# Altium PCB PCB.PcbDoc
Units mm, origin at the board's own origin, x right, y up, seen from the top; angles counter-clockwise.
Board outline 29.56 x 10.8 mm, 2 copper layers (Top Layer, Bottom Layer), stack 0.98 mm thick; 3 components, 3 nets, 24 pads, 4 vias.
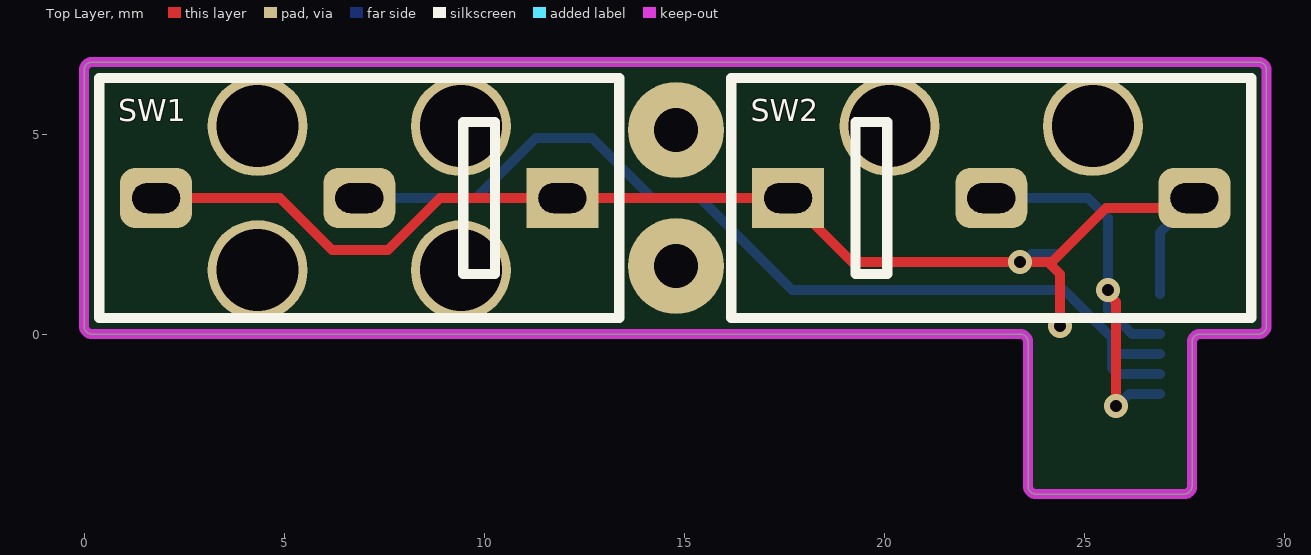
[diagram p0: Top Layer view]
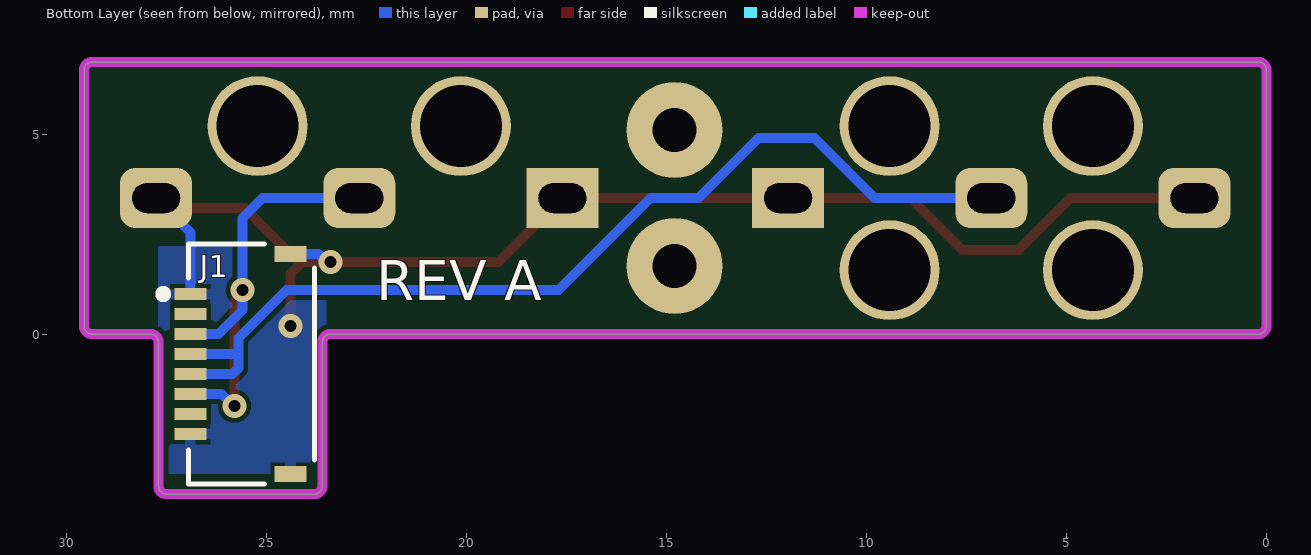
[diagram p1: Bottom Layer view, seen from below]

## Layer stack, top to bottom
Top Solder: solder mask 0.0102, Solder Resist, Dk 3.5
Top Layer: signal copper 0.0356
Dielectric 1: dielectric 0.9086, FR-4, Dk 4.8
Bottom Layer: signal copper 0.0356
Bottom Solder: solder mask 0.0102, Solder Resist, Dk 3.5

## Board outline
23.4,0 cw(c23.4,-0.2) 23.6,-0.2 23.6,-3.8 ccw(c23.8,-3.8) 23.8,-4 27.5,-4 ccw(c27.5,-3.8) 27.7,-3.8 27.7,-0.2 cw(c27.9,-0.2) 27.9,0 29.36,0 ccw(c29.36,0.2) 29.56,0.2 29.56,6.6 ccw(c29.36,6.6) 29.36,6.8 0.2,6.8 ccw(c0.2,6.6) 0,6.6 0,0.2 ccw(c0.2,0.2) 0.2,0

## Design rules (kind name [scope] priority, off if disabled: settings)
BoardOutlineClearance [All] p1: gap=0.2 ignorepadtopadclearanceinfootprint=FALSE
Clearance GND_bot [InNamedPolygon('GND_bot')] p1: gap=0.2 ignorepadtopadclearanceinfootprint=FALSE
Clearance GND_top [InNamedPolygon('GND_top')] p2: gap=0.1 ignorepadtopadclearanceinfootprint=FALSE
Clearance [All] p3: gap=0.12 ignorepadtopadclearanceinfootprint=FALSE
HoleSize [All] p1: absolutevalues=TRUE maxlimit=10 minlimit=0.025 maxpercent=80.000 minpercent=20.000
MinimumSolderMaskSliver [All] p1: minsoldermaskwidth=0.05
PolygonConnect [All] p1: thpad.connectstyle=Relief thpad.reliefconductorwidth=0.254 thpad.reliefentries=4 thpad.polygonreliefangle="90 Angle" thpad.airgapwidth=0.1 smdpad.connectstyle=Relief smdpad.reliefconductorwidth=0.254 smdpad.reliefentries=4 smdpad.polygonreliefangle="90 Angle" smdpad.airgapwidth=0.1 via.connectstyle=Direct via.reliefconductorwidth=0.254 via.reliefentries=4 via.polygonreliefangle="90 Angle" via.airgapwidth=0.254
RoutingVias [All] p1: holewidth=0.3 width=0.4 viastyle="Through Hole" minholewidth=0.3 minwidth=0.4 maxholewidth=2 maxwidth=10
SilkToSilkClearance [All] p1: silktosilkclearance=0.01
SilkToSolderMaskClearance [IsPad] p1: minsilkscreentomaskgap=0.001 clearancetoexposedcopper=TRUE
SolderMaskExpansion [All] p1: expansion=0.05 istentingtop=FALSE
SupplyNets "Schematic Supply Nets_1" [InNet('GND')] p1: voltage=0.000
UnRoutedNet [All] p1: checkbadconnections=TRUE
Width [All] p1: maxlimit=2.54 minlimit=0.089 preferedwidth=0.254
25 further rules are at their usual default settings.

## Components (designator, comment, footprint, x,y, rotation, side; value= is the part's Value field where it differs from the comment)
J1 "2328702-8" 2328702-8 23.55,-0.75 r90 bottom
SW1 "Microswitch" Microswitch 6.88,3.4 r270 top
SW2 "Microswitch" Microswitch 22.68,3.4 r90 top

## Footprints (in the part's own frame and the unit in brackets; to place one, negate y for a bottom-side part, rotate by r counter-clockwise, add the part's x,y. Pads: shape width x height; smd on the part's side, far side on the other; paste and mask are expansions set on the pad)
2328702-8 [mm]
  rect 0.3x0.8 smd mask+0.05: 1(1.75,3.35) 2(1.25,3.35) 3(0.75,3.35) 4(0.25,3.35) 5(-0.25,3.35) 6(-0.75,3.35) 7(-1.25,3.35) 8(-1.75,3.35)
  rect 0.4x0.8 smd mask+0.05: S1(2.75,0.85) S2(-2.75,0.85)
  silkscreen extent -3,0.25 3,4.13, body extent -3,0.25 3,4.08, height 1.06
Microswitch [mm]
  rect 1.5x1.8 hole 0.75 slot 1.2 at 90 deg mask+0.05: 1(0,5.08)
  rrect50% 1.5x1.8 hole 0.75 slot 1.2 at 90 deg mask+0.05: 2(0,0) 3(0,-5.08)
  silkscreen extent -3,-6.5 3,6.5, body extent -2.88,-6.4 2.88,6.35, height 7.25

## Part data
J1: "FFC/FPC Connector, 8 Contact(s), 1 Row(s), Right Angle, Solder Terminal, Natural Insulator", Actuator Color=Black, Flammability Rating="UL94 V-0", Housing Color=Natural, Manufacturer="TE Connectivity", Max Operating Temperature=85°C, Min Operating Temperature=-40°C, Operating Supply Voltage=50V, Actuator Material=Thermoplastic, Category="FFC / FPC", ComponentLink1Description=https://www.te.com/commerce/DocumentDelivery/DDEController?Action=srchrtrv&amp;DocNm=2328702&amp;DocType=Customer+Drawing&amp;DocLang=English&src-supplier=Digikey, ComponentLink1URL=https://www.te.com/commerce/DocumentDelivery/DDEController?Action=srchrtrv&amp;DocNm=2328702&amp;DocType=Customer+Drawing&amp;DocLang=English&src-supplier=Digikey, Connector System=Wire-to-Board, Contact Material="Copper Alloy", Contact Plating=Gold, Gender=Receptacle, Height=1mm, Housing Material=Thermoplastic, Length=6mm, Manufacturer Part Number=2328702-8, Mounting Technology="Surface Mount", Number of Contacts=8, Number of Positions=8, Number of Rows=1, Orientation="Right Angle", Packaging="Cut Tape", Plating=Gold, Pricing 1="28000=0.0961 (USD)", RoHS=Yes, Sealable="No (Without)", Series=-, Stock 1=56000, Supplier 1="Arrow Electronics", Supplier Part Number 1=2328702-8, Termination=Solder, Voltage Rating=50V

## Free pads (board coordinates)
  round 2.5 hole 2.05: ""(4.34,1.6) ""(4.34,5.2) ""(9.42,1.6) ""(9.42,5.2) ""(20.14,5.2) ""(25.22,5.2)
  round 2.4 hole 1.1: ""(14.8,1.7) ""(14.8,5.1)

## Via types
v1: diameter 0.6, hole 0.3, Top Layer to Bottom Layer, tented both sides, 4 vias

## Nets (pads, with @x,y where several pads share a name; then routed paths per layer and width w, separated by ;. In a path a pad name is that pad's centre, name@x,y a point inside that pad or via, vN(x,y) a via of type N, cw(c..) or ccw(c..) an arc to the next point about the centre after c; other vN are vias at no path point)
CLICK_BACKWARD: J1.3 J1.6 SW2.2 | length 11.2
  Top Layer w0.25: v1(25.6,1.1) 25.6,1.005 25.8,0.805 v1(25.8,-1.8)
  Bottom Layer w0.25: SW2.2 25.1,3.4 25.6,2.9 v1(25.6,1.1) 25.6,0.6 26.2,0 J1.3 ; v1(25.8,-1.8) 25.825,-1.8 26.125,-1.5 J1.6
CLICK_FORWARD: J1.4 J1.5 SW1.2 | length 24.7
  Bottom Layer w0.25: SW1.2 9.8,3.4 11.3,4.9 12.7,4.9 14.2,3.4 15.4,3.4 17.7,1.1 24.5,1.1 25.7,-0.1 25.7,-0.5 ; J1.5 25.846,-1 25.7,-0.854 25.7,-0.5 ; J1.4@26.901,-0.5 25.7,-0.5
GND: J1.1 J1.8 J1.S1 J1.S2 SW1.1 SW1.3 SW2.1 SW2.3 | length 33.9
  Top Layer w0.25: SW1.3 4.9,3.4 6.2,2.1 7.6,2.1 8.9,3.4 SW1.1 SW2.1 19.2,1.8 v1(23.4,1.8) 24.1,1.8 ; v1(24.4,0.2) 24.4,1.5 24.1,1.8 ; SW2.3 27.51,3.15 25.55,3.15 24.2,1.8 24.1,1.8
  Bottom Layer w0.25: v1(23.4,1.8) 23.495,1.8 23.695,2 J1.S1 ; J1.1 26.9,2.54 SW2.3
pads on no net: J1.2 J1.7

## Polygon pours and split planes (outlines as drawn)
GND on Bottom Layer "GND_L02_P000" (solid, pour order 0): 23.5,2.2 27.7,2.2 27.7,-3.7 23.5,-3.7

## Keep-outs
Keep-Out Layer:
  the board outline again, w0.254

## Silkscreen, mask and mechanical layers (free items; w line width, h text height)
Bottom Overlay:
  text "REV A" at 22.25,0.85 h1